# Altium PCB Chronos.PcbDoc (part 5 of 6)
Units mm, origin at the board's own origin, x right, y up, seen from the top; angles counter-clockwise.
Board outline 74.94 x 59.01 mm, 8 copper layers (TOP, L02_GND, L03_SIG, L04_PWR, L05_GND, L06_SIG, L07_GND, BOTTOM), stack 1.624 mm thick; 413 components, 238 nets, 1566 pads, 873 vias.
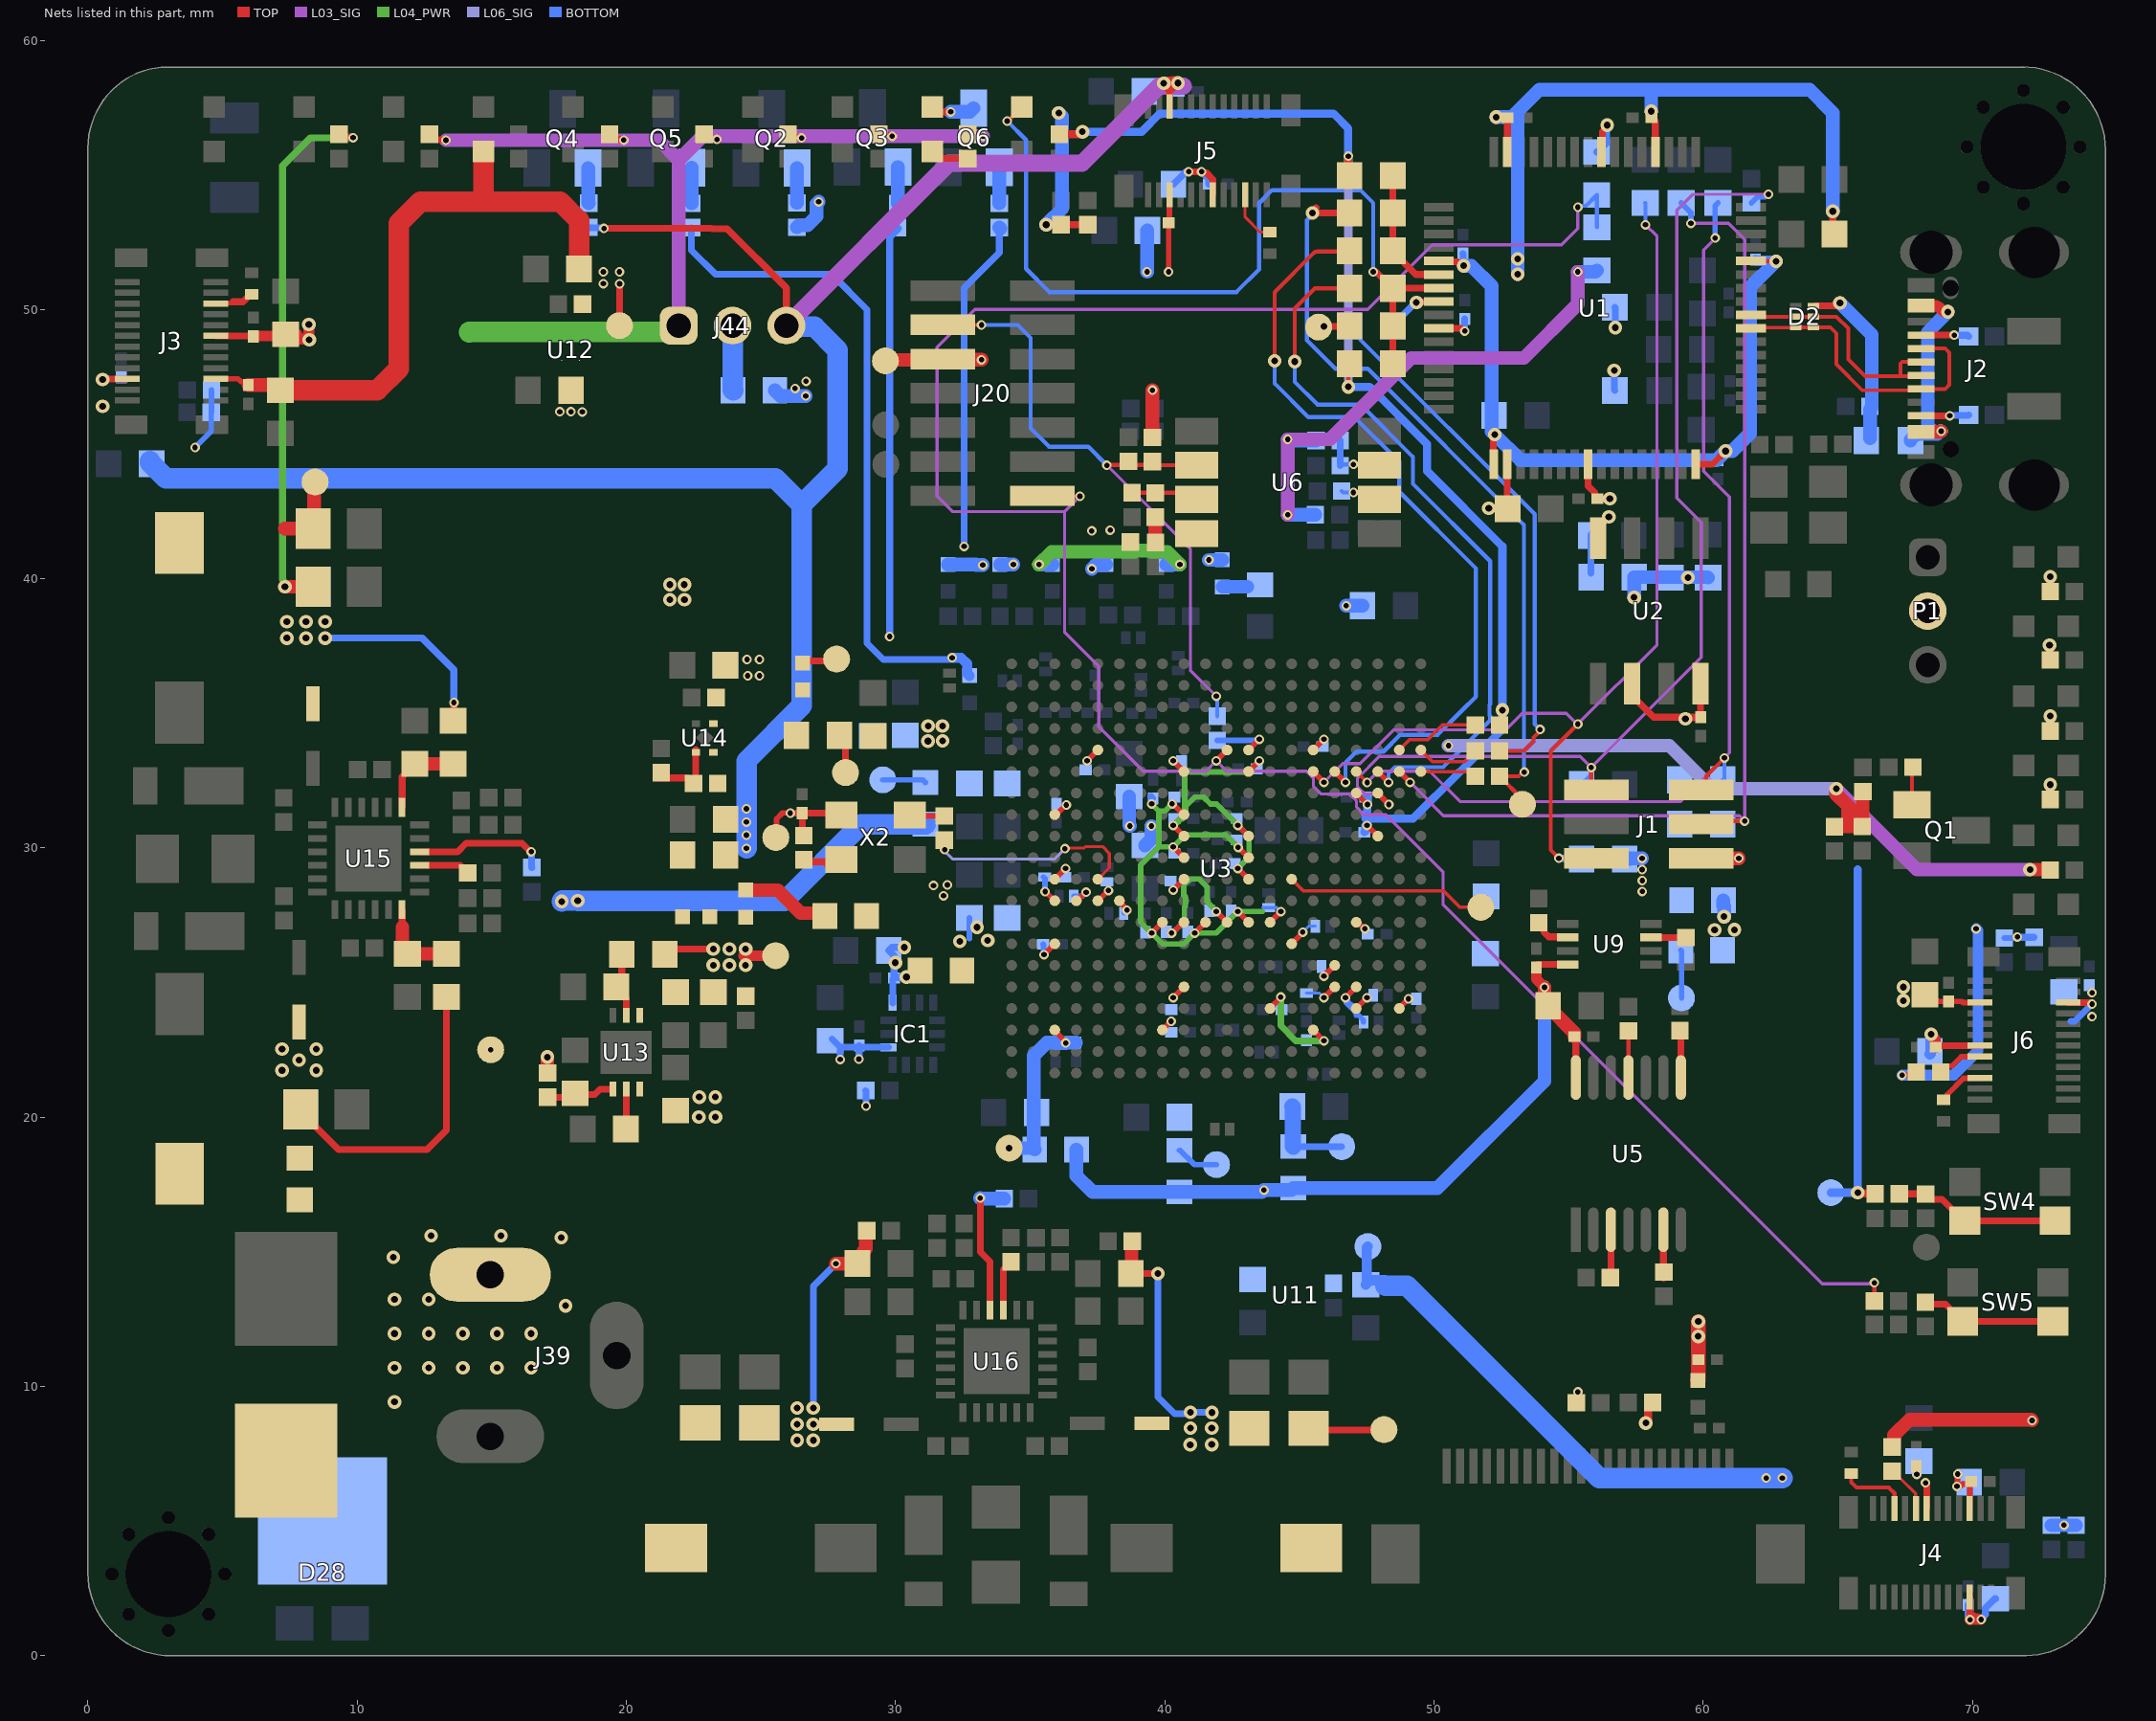
[diagram p10: the nets of this part, all layers, seen from the top]

## Via types
v1: diameter 0.356, hole 0.203, TOP to BOTTOM, tented both sides, 492 vias
v2: diameter 0.508, hole 0.254, TOP to BOTTOM, tented both sides, 380 vias
v3: diameter 0.356, hole 0.203, TOP to BOTTOM, 1 vias

## Nets (pads, with @x,y where several pads share a name; then routed paths per layer and width w, separated by ;. In a path a pad name is that pad's centre, name@x,y a point inside that pad or via, vN(x,y) a via of type N, cw(c..) or ccw(c..) an arc to the next point about the centre after c; other vN are vias at no path point) (continued)
NetD27_1: D27.1 Q6.3 | length 1.7
  TOP w0.254: D27.1@31.359,57.515 31.533,57.341 v1(32.049,57.341)
  BOTTOM w0.508: v1(32.049,57.341) 32.763,57.341 Q6.3@32.9,57.477
NetD27_2: D27.2 R126.1 | length 1.4
  TOP w0.254: D27.2@31.359,55.864 31.618,55.605 R126.1@32.679,55.605
NetD28_3: D28.3 F1.1 J39.1
  other v2: 11.386,9.428 11.386,10.698 12.656,10.698 13.926,10.698 15.196,10.698 16.466,10.698 11.386,11.968 12.656,11.968 13.926,11.968 15.196,11.968 16.466,11.968 17.745,13 11.386,13.238 12.656,13.238 11.345,14.8 17.579,15.529 12.745,15.6 15.345,15.6
NetFB2_1: FB2.1 J3.15 | length 1.5
  TOP w0.152: J3.15@4.745,50.222 4.756,50.233 5.342,50.233 5.398,50.289 ; FB2.1@6.01,50.485 FB2.1@6.086,50.561
  TOP w0.254: 5.398,50.289 5.764,50.289 5.963,50.488 FB2.1@6.01,50.488
NetFB3_1: FB3.1 J4.15 | length 2.7
  TOP w0.152: FB3.1@65.502,6.765 65.502,6.443 65.694,6.251 66.894,6.251 67.109,6.036 J4.15@67.109,5.464
NetFB5_1: FB5.1 R137.2 | length 0.9
  BOTTOM w0.508: FB5.1@42.145,39.7 R137.2@43.064,39.7
NetFB6_1: FB6.1 R138.2 | length 3.4
  TOP w0.508: FB6.1@24.429,28.435 25.623,28.435 26.475,27.583 27.267,27.583 R138.2@27.374,27.476 R138.2@27.32,27.476
NetFB7_1: FB7.1 R149.1
NetFB8_1: FB8.1 R150.1
NetFB9_1: FB9.1 J5.15 | length 2
  TOP w0.114: J5.15@42.985,54.261 42.985,53.437 43.55,52.872 FB9.1@43.912,52.872
NetFB10_1: FB10.1 J6.15 | length 1.7
  TOP w0.203: FB10.1@68.925,20.651 68.975,20.651 69.073,20.749 69.073,20.849 69.671,21.447 70.267,21.447 J6.15@70.281,21.46
NetJ2_A5: J2.A5 R55.1 | length 1.8
  TOP w0.254: J2.A5@68.095,46.05 69.157,46.05 v1(69.164,46.056)
  BOTTOM w0.254: v1(69.164,46.056) 69.176,46.068 69.854,46.068 R55.1@69.866,46.08
NetJ2_B5: J2.B5 R56.1 | length 1.8
  TOP w0.254: J2.B5@68.095,49.05 68.097,49.047 69.325,49.047 v1(69.327,49.045)
  BOTTOM w0.254: v1(69.327,49.045) 69.821,49.045 R56.1@69.866,49
NetJ4_17: J4.17 R36.1 | length 1.8
  TOP w0.114: R36.1@67.026,6.852 67.294,6.585 67.333,6.585 67.889,6.028 67.889,5.484 J4.17@67.909,5.464
NetJ6_17: J6.17 R51.1 | length 1.7
  TOP w0.203: R51.1@68.822,21.682 69.046,21.905 69.25,21.905 69.591,22.247 70.267,22.247 J6.17@70.281,22.26
NetJ44_2: J44.2 R127.1 | length 2.4
  BOTTOM w0.762: J44.2@23.945,49.4 23.957,49.388 23.957,47.012 R127.1@23.97,47
NetL15_1: L15.1 R153.1
NetQ1_1: Q1.1 R83.1 | length 1.4
  TOP w0.152: Q1.1@67.758,31.608 67.758,32.963 R83.1@67.795,33
NetQ2_1: Q2.1 R123.1 | length 1.3
  BOTTOM w0.508: R123.1@26.334,53.955 26.338,53.959 26.338,55.251 Q2.1@26.342,55.255
NetQ3_1: Q3.1 R122.1 | length 1.4
  BOTTOM w0.508: R122.1@30.08,53.939 30.085,53.944 30.085,55.284 Q3.1@30.09,55.289
NetQ4_1: Q4.1 R124.1 | length 1.3
  BOTTOM w0.508: Q4.1@18.574,55.255 18.589,55.24 18.589,53.965 R124.1@18.605,53.95
NetQ5_1: Q5.1 R132.1 | length 1.4
  BOTTOM w0.508: Q5.1@22.398,54.94 Q5.1@22.426,54.968 ; R132.1@22.422,53.937 22.426,53.942 Q5.1@22.426,54.968 ; Q5.1@22.43,55.266 22.43,54.972 Q5.1@22.426,54.968
NetQ6_1: Q6.1 R133.1 | length 1.3
  BOTTOM w0.508: Q6.1@33.85,55.278 33.852,55.276 33.852,53.944 R133.1@33.854,53.942
NetR12_2: R12.2 R16.2 U2.4 | length 2.4
  BOTTOM w0.254: R12.2@55.826,40.203 55.826,41.625 v2@56.499,42.297
  other v2: 56.499,42.297
NetR15_1: R15.1 R19.1 R20.1 U1.38 | length 4.9
  TOP w0.254: R19.1@48.47,54.977 R20.1@48.47,53.58 R15.1@48.47,52.183 48.47,52.157 49.329,51.299 U1.38@50.176,51.299
NetR22_1: R22.1 U1.40 | length 2.1
  TOP w0.254: v2(49.351,50.262) 49.369,50.281 50.157,50.281 U1.40@50.176,50.299
  BOTTOM w0.254: R22.1@48.47,49.389 48.47,49.414 49.319,50.262 v2(49.351,50.262)
NetR23_1: R23.1 X2.1 | length 1.5
  TOP w0.254: R23.1@26.561,29.494 27.45,29.494 X2.1@27.45,29.495 ; X2.1@27.425,29.394 27.836,29.805 X2.1@27.907,29.805
NetR24_1: R24.1 X2.3 | length 1.4
  TOP w0.203: X2.3@30.447,31.226 30.485,31.188 R24.1@31.877,31.188
NetR24_2: R24.2 U3.L5 | length 8.1
  TOP w0.114: R24.2@31.814,30.288 31.826,30.276 v1(31.826,29.94) ; v1(36.292,29.972) 36.319,29.999 37.009,29.999 37.065,30.055 37.69,30.055 37.945,29.8 37.945,29.269 U3.L5@37.515,28.84
  L06_SIG w0.114: v1(31.826,29.94) 31.826,29.874 32.107,29.593 32.745,29.593 35.913,29.593 v1(36.292,29.972)
NetR34_1: R34.1 U3.M3 | length 1.1
  TOP w0.203: v1(35.558,28.381) 35.566,28.381 35.945,28.003 U3.M3@35.945,28
  BOTTOM w0.203: R34.1@35.495,28.926 35.551,28.869 35.551,28.388 v1(35.558,28.381)
NetR35_1: R35.1 U3.M4 | length 1
  TOP w0.203: U3.M4@36.716,28.043 36.746,28.043 37.056,28.354 v1(37.083,28.354)
  BOTTOM w0.203: R35.1@36.624,28.215 36.943,28.215 v1(37.083,28.354)
NetR47_1: R47.1 U3.M5 | length 0.6
  TOP w0.203: U3.M5@37.515,28.043 37.526,28.043 37.903,28.421 v1(37.911,28.421)
NetR48_1: R48.1 U3.M6 | length 0.6
  TOP w0.203: U3.M6@38.316,28.04 38.316,28.007 38.597,27.726 v1(38.597,27.693)
  BOTTOM w0.203: R48.1@38.491,27.587 v1(38.597,27.693)
NetR58_1: R58.1 U5.3 | length 1.8
  TOP w0.254: R58.1@56.554,14.046 56.573,14.066 U5.3@56.573,15.821
NetR59_1: R59.1 U5.6 | length 1.8
  TOP w0.254: U5.6@58.523,15.821 58.523,14.033 R59.1@58.535,14.021
NetR60_1: R60.1 U5.8 | length 1.8
  TOP w0.254: R60.1@59.138,23.216 59.173,23.181 U5.8@59.173,21.472
NetR61_1: R61.1 U5.11 | length 1.7
  TOP w0.152: U5.11@57.223,21.472 57.232,21.48 R61.1@57.232,23.208
NetR62_1: R62.1 U9.6 | length 1.3
  TOP w0.254: R62.1@53.896,27.221 54.094,27.023 54.094,26.869 54.264,26.7 U9.6@54.939,26.7
NetR63_1: R63.1 U9.3 | length 1.3
  TOP w0.254: U9.3@58.062,26.677 59.354,26.677 R63.1@59.357,26.674
NetR64_1: R64.1 U3.N13 | length 1.3
  TOP w0.203: U3.N13@43.915,27.24 v1(44.315,27.64)
  BOTTOM w0.114: R64.1@43.639,27.785 44.17,27.785 v1(44.315,27.64)
NetR65_1: R65.1 U3.P14 | length 1.1
  TOP w0.203: U3.P14@44.716,26.44 v1@45.116,26.84
  BOTTOM w0.114: v1(45.125,26.875) 45.345,27.096 R65.1@45.596,27.096
NetR66_1: R66.1 U3.R16 | length 0.6
  TOP w0.203: v1(45.915,25.24) 45.915,25.26 45.995,25.34 v1@45.995,25.36 ; v1@46.015,25.34 U3.R16@46.315,25.64
NetR67_1: R67.1 U3.T16 | length 1.3
  TOP w0.203: v1(45.915,24.44) U3.T16@46.315,24.84
  BOTTOM w0.114: R67.1@45.258,24.613 45.742,24.613 v1(45.915,24.44)
NetR68_1: R68.1 U3.T17 | length 2.6
  TOP w0.203: v1(46.715,24.44) U3.T17@47.115,24.84
  BOTTOM w0.114: v1(46.715,24.44) 46.744,24.411 47.073,24.082 47.073,23.915 47.073,23.763 47.099,23.738
  BOTTOM w0.203: v1@46.744,24.411 46.744,24.243 47.073,23.915 47.385,23.602 R68.1@47.385,23.537
NetR69_2: R69.2 R72.1 SW4.1 SW4.3 | length 6.2
  TOP w0.254: R69.2@67.293,17.157 68.25,17.157 68.458,16.949 68.874,16.949 69.671,16.152 SW4.1@73.071,16.152
NetR70_1: R70.1 U3.U17 | length 0.6
  TOP w0.203: U3.U17@47.115,24.04 v1(47.515,24.44)
NetR73_2: R73.2 U3.E20 | length 2.4
  TOP w0.127: U3.E20@49.515,33.64 49.955,33.2 50.945,33.2 51.135,33.2 R73.2@51.539,33.604
NetR74_2: R74.2 U3.F20 | length 2.1
  TOP w0.127: U3.F20@49.515,32.84 51.364,32.84 R74.2@51.539,32.664
NetR75_1: R75.1 U3.E19 | length 3.2
  TOP w0.127: U3.E19@48.715,33.64 49.106,34.031 49.775,34.031 50.314,34.569 50.945,34.569 R75.1@51.539,34.569
NetR78_2: R78.2 U3.E12 | length 2.1
  TOP w0.203: U3.E12@43.115,33.64 v1(43.515,34.04)
  BOTTOM w0.203: R78.2@41.949,33.996 43.389,33.996 ccw(c43.388,34.199) v1(43.515,34.04)
NetR80_1: R80.1 SW5.1 SW5.3 | length 5.1
  TOP w0.254: R80.1@68.161,13.034 68.191,13.064 69,13.064 69.197,12.867 69.197,12.817 69.595,12.419 SW5.1@72.995,12.419
NetR85_1: R85.1 R91.1 U6.3 | length 1.4
  BOTTOM w0.152: R91.1@46.572,44.247 v1(47.011,44.247)
  BOTTOM w0.254: R91.1@46.521,44.196 46.572,44.247 46.521,44.298 R85.1@46.521,45.136
NetR87_1: R87.1 R90.2 U6.7 | length 2.6
  TOP w0.152: R90.2@38.789,43.19 40.934,43.19 U6.7@41.18,42.945 U6.7@41.083,42.848
NetR89_2: R89.2 U6.2 | length 0.5
  BOTTOM w0.152: R89.2@46.572,43.256 46.623,43.205 v1(47.011,43.205)
NetR140_1: R140.1 R145.1 U14.3 | length 2.7
  TOP w0.254: R145.1@21.145,32.6 22.295,32.6 R140.1@22.494,32.4 22.578,32.484 U14.3@22.578,33.649
NetR142_1: R142.1 R146.1 U13.4 | length 2.6
  TOP w0.254: R142.1@17.072,20.743 17.95,20.743 R146.1@18.092,20.885 18.128,20.848 18.829,20.848 19.023,21.041 U13.4@19.494,21.041
NetR143_1: R143.1 R148.2 U13.2 | length 2.5
  TOP w0.254: R143.1@19.829,26.048 19.829,25.048 R148.2@19.63,24.848 19.63,24.823 19.995,24.458 U13.2@19.995,23.791
NetR147_1: R147.1 U13.5 | length 1.5
  TOP w0.254: R147.1@19.982,19.559 19.995,19.572 U13.5@19.995,21.041
NetR151_2: R151.2 U15.21 | length 1.9
  TOP w0.254: U15.21@12.321,29.36 13.827,29.36 R151.2@14.111,29.077
NetR154_2: R154.2 R156.1 U15.1 | length 3.2
  TOP w0.254: U15.1@11.671,31.51 11.671,32.651 R156.1@12.148,33.128
  TOP w0.508: R156.1@12.148,33.128 R154.2@13.57,33.128
NetR155_2: R155.2 R160.1 U15.18 | length 3.2
  TOP w0.254: U15.18@11.671,27.71 11.671,27.06 11.679,27.051
  TOP w0.508: 11.679,27.051 11.679,26.256 R160.1@11.868,26.067 R155.2@13.316,26.067
NetR158_1: R158.1 U15.22 | length 5
  TOP w0.254: U15.22@12.321,29.86 13.731,29.86 14.045,30.174 16.128,30.174 16.442,29.86 v1(16.47,29.86) v1@16.48,29.87
  BOTTOM w0.254: v1(16.47,29.86) 16.48,29.849 16.48,29.284 R158.1@16.491,29.273
NetR161_2: R161.2 U16.21 | length 1.9
  TOP w0.254: U16.21@34.003,12.837 34.003,14.344 R161.2@34.287,14.628
NetR167_1: R167.1 U16.22 | length 5.2
  TOP w0.254: v1(33.145,17) 33.149,16.996 33.149,14.996 33.503,14.641 U16.22@33.503,12.837
  BOTTOM w0.508: v1(33.145,17) 33.168,16.977 R167.1@34.04,16.977
NetR173_1: R173.1 U1.24 | length 2.2
  TOP w0.254: U1.24@56.226,55.849 56.259,55.882 56.259,56.601 56.434,56.776 v2(56.434,56.845)
  BOTTOM w0.254: R173.1@56.052,55.853 56.077,55.853 56.425,56.201 56.425,56.836 v2(56.434,56.845)
NetTP9_1: TP9.1 U3.L14 | length 7.5
  TOP w0.127: U3.L14@44.716,28.84 45.15,28.405 50.358,28.405 50.963,27.8 51.027,27.8 TP9.1@51.745,27.8
PROGRAMN: J20.1 R77.1 R172.2 R173.2 U3.E11 | length 89.7
  TOP w0.152: J20.1@35.45,43.078 35.469,43.059 v1(36.847,43.059) ; R77.1@66.363,13.172 v1(66.363,13.853)
  TOP w0.203: v1(41.915,33.24) U3.E11@42.315,33.64
  L03_SIG w0.114: v1(36.847,43.059) 36.285,42.496 ; v1(55.345,53.8) 55.345,53 54.745,52.4 49.945,52.4 47.545,50 32.945,50 31.545,48.6 31.545,43.067 32.115,42.496 36.285,42.496 ; v1@66.363,13.814 64.422,13.814 50.345,27.891 50.345,29.102 48.215,31.232 47.405,31.232 47.125,31.512 47.125,31.742 46.865,32.002 46.566,32.002 46.563,32 46.067,32 46.065,32.002 45.819,32.002 45.519,32.302 45.519,32.607 45.272,32.854 42.301,32.854 v1(41.915,33.24) 41.527,32.852 39.893,32.852 39.203,32.852 37.554,34.502 37.554,36.737 36.285,38.006 36.285,42.496
  BOTTOM w0.152: v1(55.345,53.8) 55.4,53.8 55.453,53.854 55.653,53.854 R173.2@56.052,54.253 56.057,54.248 R172.2@56.057,53.055
RXD_UART: R17.2 U3.F18 | length 27.1
  TOP w0.152: v2(44.831,48.067) 44.831,50.041 45.575,50.786 R17.2@46.87,50.786
  TOP w0.203: U3.F18@47.915,32.84 v1(48.315,32.44)
  BOTTOM w0.152: v2(44.831,48.067) 44.831,47.313 45.675,46.47 47.275,46.47 49.221,44.524 49.221,43.524 52.089,40.655 52.089,35.35 52.062,35.323 52.062,34.923 52.089,34.895 52.089,34.745 50.945,33.6 50.345,33 48.545,33 48.315,32.771 v1(48.315,32.44)
SCL: R20.2 R74.1 TP1.1 | length 29
  TOP w0.152: TP1.1@53.285,31.623 53.285,31.819 R74.1@52.439,32.664 53.15,32.664 53.301,32.815 v1(53.356,32.815)
  TOP w0.254: v2@45.619,53.78 45.491,53.652 v2(45.491,53.583) 46.866,53.583 R20.2@46.87,53.58 ; TP1.1@53.238,31.576 TP1.1@53.285,31.623
  BOTTOM w0.152: v2(45.491,53.583) 45.491,53.521 45.286,53.316 45.286,48.859 46.345,47.8 47.545,47.8 53.345,42 53.345,32.827 v1(53.356,32.815)
SDA: R21.2 R22.2 R73.1 TP2.1 | length 22.7
  TOP w0.152: R73.1@52.439,33.604 53.349,33.604 53.703,33.959 53.703,34.104 53.945,34.345 v1(53.945,34.4)
  TOP w0.254: v2(45.917,49.368) 46.85,49.368 R21.2@46.87,49.389
  BOTTOM w0.152: R22.2@46.86,49.398 46.831,49.368 45.985,49.368 v2(45.917,49.368) 46.865,49.368 47.269,48.965 47.269,48.876 53.745,42.4 53.745,34.6 v1(53.945,34.4)
SPI_MCLK: C81.1 J20.12 R78.1 R86.1 U6.6 | length 25.8
  TOP w0.152: J20.12@31.75,49.428 v1(33.193,49.428) ; v1(37.854,44.21) 37.868,44.224 R86.1@39.518,44.224 ; C81.1@38.635,44.341 C81.1@38.654,44.359 ; C81.1@38.745,44.215 R86.1@39.609,44.215 ; R86.1@39.409,44.215 R86.1@39.545,44.35 ; R86.1@39.557,44.162 R86.1@39.609,44.215 ; U6.6@41.016,44.379 U6.6@41.18,44.215 R86.1@39.609,44.215
  L03_SIG w0.114: v1@37.945,44.2 37.932,44.188 37.932,44.131 40.953,41.111 40.953,38.4 40.953,36.603 v1(41.915,35.64)
  BOTTOM w0.152: v1(33.193,49.428) 34.539,49.428 35.022,48.946 35.022,45.585 35.708,44.899 37.164,44.899 v1(37.854,44.21) ; v1(41.915,35.64) cw(c41.834,35.559) 41.949,35.559 R78.1@41.949,34.896
TCK: J1.6 R4.1 R5.2 U3.G18 | length 40.4
  TOP w0.152: v1(55.843,32.991) 55.843,32.347 J1.6@56.034,32.156
  TOP w0.203: U3.G18@47.915,32.04 47.915,32.031 48.323,31.623 v1(48.323,31.614)
  L03_SIG w0.114: v1(48.323,31.614) 48.323,31.632 47.96,31.996 47.457,31.996 47.38,32.073 47.37,32.073 47.158,32.285 47.158,32.586 47.974,33.401 48.117,33.401 49.654,33.401 55.433,33.401 v1(55.843,32.991) 59.929,37.077 59.929,42.092 59.026,42.995 59.026,53.682 59.624,54.28 v1(62.429,54.28)
  BOTTOM w0.152: R4.1@55.483,32.356 55.843,32.716 v1(55.843,32.991)
  BOTTOM w0.203: R5.2@61.799,53.959 62.022,54.183 62.29,54.183 62.387,54.28 v1(62.429,54.28)
TDI: J1.5 R2.2 R6.2 U3.F17 | length 38.9
  TOP w0.127: U3.F17@47.115,32.84 v1(47.52,32.435)
  TOP w0.152: J1.5@59.934,32.156 60.119,32.342 60.119,32.671 v1(60.794,33.345)
  L03_SIG w0.114: v1(47.52,32.435) 47.52,32.445 47.93,32.854 49.842,32.854 50.972,31.724 51.027,31.724 59.173,31.724 v1(60.794,33.345) 60.794,33.348 60.982,33.536 60.982,43.033 60.016,43.999 60.016,52.206 60.447,52.638 v1(60.447,52.654)
  BOTTOM w0.152: R2.2@60.734,32.531 60.794,32.591 v1(60.794,33.345)
  BOTTOM w0.203: v1(60.447,52.654) 60.447,53.849 R6.2@60.553,53.955
TDO: J1.3 R3.2 R7.2 U3.F19 | length 40.9
  TOP w0.152: J1.3@59.934,30.886 60.047,31 v1(61.545,31)
  TOP w0.203: U3.F19@48.715,32.84 v1(49.116,32.44)
  L03_SIG w0.114: v1(49.116,32.44) 50.355,31.2 61.345,31.2 v1(61.545,31) 61.545,52.6 60.945,53.2 v1(59.545,53.2)
  BOTTOM w0.152: R3.2@60.734,30.886 60.847,31 v1(61.545,31)
  BOTTOM w0.203: R7.2@59.182,53.955 59.545,53.592 v1(59.545,53.2)
TMS: J1.2 R1.2 R8.2 U3.F15 | length 39.7
  TOP w0.152: v1(55.345,34.6) 54.339,33.594 54.339,29.924 v1(54.645,29.617) J1.2@56.034,29.616
  TOP w0.203: U3.F15@45.515,32.84 v1(45.915,32.44)
  L03_SIG w0.114: v1(45.915,32.44) 46.612,33.136 47.254,33.136 48.501,34.384 50.945,34.384 52.663,34.384 53.28,35 54.919,35 55.332,34.587 58.289,37.544 58.289,52.715 v1(57.857,53.147)
  BOTTOM w0.152: R1.2@55.461,29.617 R1.2@55.483,29.594 ; R8.2@57.851,53.955 57.857,53.949 v1(57.857,53.147)
  BOTTOM w0.254: v1(54.645,29.617) R1.2@55.461,29.617
TXD_UART: R15.2 U3.F16 | length 29.7
  TOP w0.152: v2(44.082,48.093) 44.082,50.579 cw(c44.234,50.579) 44.126,50.687 45.545,52.106 cw(c45.653,51.998) 45.653,52.15 46.837,52.15 R15.2@46.87,52.183
  TOP w0.203: U3.F16@46.315,32.84 v1(46.715,32.44)
  BOTTOM w0.152: v2(44.082,48.093) 44.082,47.252 45.334,46 47.056,46 48.713,44.343 48.713,43.232 51.561,40.384 51.561,35.624 51.027,35.089 50.142,34.205 48.75,34.205 48.127,33.582 47.127,33.582 46.715,33.171 v1(46.715,32.44)
UART_ACT: D1.1 R17.1 R18.1 R21.1 U1.39 | length 31
  TOP w0.152: v1(34.145,57) 34.177,57 D1.1@34.692,57.515
  TOP w0.254: v1(47.745,51.4) 47.856,51.4 R17.1@48.47,50.786 ; R18.1@48.47,47.992 R21.1@48.47,49.389 R17.1@48.47,50.786 ; U1.39@50.176,50.799 48.484,50.799 R17.1@48.47,50.786
  BOTTOM w0.152: v1(34.145,57) 34.847,56.298 34.847,51.514 35.713,50.648 42.667,50.648 43.505,51.485 43.505,53.949 43.988,54.432 47.265,54.432 47.745,53.952 v1(47.745,51.4)
USB_D_N: D2.3 D2.4 J2.A7 J2.B7 U1.7 | length 11.4
  TOP w0.14: U1.7@61.776,49.299 61.804,49.327 63.438,49.327 D2.3@63.445,49.333 D2.4@64.095,49.333 64.729,49.333 64.948,49.115 64.948,47.963 65.911,47 68.045,47 J2.B7@68.095,47.05 68.995,47.05 69.145,47.2 69.145,48.4 68.995,48.55 J2.A7@68.095,48.55
USB_D_P: D2.2 D2.5 J2.A6 J2.B6 U1.8 | length 9.2
  TOP w0.14: U1.8@61.776,49.799 61.842,49.733 D2.2@63.445,49.733 D2.5@64.095,49.733 64.958,49.733 65.392,49.299 65.392,48.147 66.021,47.518 67.33,47.518 ; J2.A6@68.095,47.55 68.063,47.518 67.33,47.518 ; J2.B6@68.095,48.05 67.395,48.05 67.33,47.985 67.33,47.518
V1P0_LDO: C137.1 C138.1 FB7.2 L6.2 L7.2 L8.2 L9.2 R133.2 R141.1 TP_V1P0_LDO.1 U14.1 | length 22.2
  TOP w0.254: FB7.2@26.545,36.875 26.616,36.946 27.739,36.946 TP_V1P0_LDO.1@27.81,37.017
  L04_PWR w0.508: v1(35.332,40.531) 35.801,41 38.895,41 38.943,41.048 39.427,41.048 39.475,41 40.096,41 v1(40.565,40.531)
  BOTTOM w0.254: v1(32.545,41.2) 32.545,50.8 33.854,52.109 R133.2@33.854,53.042
  BOTTOM w0.508: L9.2@31.945,40.531 31.962,40.531 31.966,40.527 32.982,40.527 33,40.509 v1(33.24,40.509) ; R133.2@33.854,53.042 R133.2@33.886,53.01 ; L7.2@33.879,40.531 v1(34.382,40.531) ; v1(35.332,40.531) L8.2@35.835,40.531 ; L6.2@40.062,40.531 v1(40.565,40.531)
  other v1: 24.506,36.398 24.945,36.4 24.482,37.001 24.945,37
V1P2: C19.1 C22.1 C39.1 C40.1 C46.1 C47.1 C103.1 C104.1 C110.1 J3.18 J4.18 J5.18 J6.18 R116.1 R123.2 TP_V1P2.1 U11.1 | length 33.1
  TOP w0.254: J3.18@4.745,49.022 4.751,49.017 C40.1@6.128,49.017 ; v1(40.889,55.118) v1(41.372,55.118) 41.399,55.118 41.45,55.067 41.549,55.067 41.785,54.831 J5.18@41.785,54.261 ; C19.1@67.915,7.041 67.927,7.029 67.927,6.751 v1(67.939,6.739) ; v1(68.263,6.42) 68.263,6.393 68.309,6.347 J4.18@68.309,5.464 ; C104.1@68.645,22.6 68.705,22.66 J6.18@70.281,22.66
  TOP w0.406: C40.1@6.128,49.017 7.282,49.017 C39.1@7.342,49.077 ; C39.1@7.765,49.077 7.524,49.077 C39.1@7.342,49.077 ; v2@8.208,48.902 v2(8.208,49.442) ; v2(8.22,48.876) 8.2,48.895 7.524,48.895 C39.1@7.342,49.077 ; v2(68.471,23.082) 68.471,23.054 68.623,22.903 68.623,22.603 68.626,22.6 C104.1@68.645,22.6
  BOTTOM w0.254: C46.1@40.322,54.656 40.784,55.118 v1(40.889,55.118) ; v1(41.372,55.118) 41.639,54.851 C47.1@41.639,54.661
  BOTTOM w0.381: C110.1@47.469,13.778 C110.1@47.507,13.816 ; TP_V1P2.1@47.545,15.2 47.507,15.162 C110.1@47.507,13.816 ; 48.193,13.945 47.636,13.945 C110.1@47.507,13.816
  BOTTOM w0.406: C103.1@68.427,22.345 68.452,22.37 68.452,23.063 v2(68.471,23.082)
  BOTTOM w0.508: R123.2@26.334,53.054 26.405,53.125 26.729,53.125 27.065,53.461 27.065,53.921 v1(27.145,54)
  BOTTOM w0.762: 48.193,13.745 49,13.745 56.145,6.6 v1(62.345,6.6) v1(62.945,6.6)
V1P8: C23.1 C24.1 C41.1 C42.1 C48.1 C49.1 C69.1 C70.1 C71.1 C72.1 C98.1 C99.1 C100.1 C105.1 C109.1 C135.1 C167.2 C169.1 C170.1 C171.1 D34.2 IC1.5 IC1.8 J3.3 J4.3 J5.3 J6.3 J44.3 L17.1 P1.2 R57.1 R124.2 R130.1 R134.1 R135.1 R136.1 R140.2 R150.2 R165.1 TP_V1P8.1 U5.14 U9.8 U11.3 U11.4 U14.4 | length 131.6
  TOP w0.203: v2(39.964,58.404) 39.964,58.322 40.102,58.184 40.102,58.158 40.154,58.106 40.154,58.007 ; J5.3@40.185,57.541 40.198,57.554 40.198,58.089 v2@40.49,58.38
  TOP w0.254: v2(0.545,47.4) 0.561,47.417 1.46,47.417 J3.3@1.465,47.422 ; v1(19.172,53.01) 23.169,53.01 23.176,53.003 23.742,53.003 25.945,50.8 J44.3@25.945,49.4 ; R165.1@38.745,14.2 v2(39.745,14.2) ; 46.147,8.38 48.125,8.38 TP_V1P8.1@48.145,8.4 ; C99.1@53.81,25.68 U9.8@54.959,25.68 ; C100.1@55.223,22.998 55.273,22.947 U5.14@55.273,21.472 ; J4.3@69.909,2.184 J4.3@69.913,2.18 ; v1(69.917,1.339) 69.913,1.343 J4.3@69.913,2.18 ; v1(70.328,1.346) 70.3,1.346 70.202,1.444 70.078,1.444 69.915,1.608 69.915,2.178 J4.3@69.913,2.18 ; J6.3@73.561,24.26 73.566,24.254 74.368,24.254 74.419,24.204 v1(74.447,24.204)
  TOP w0.381: C99.1@53.81,25.565 53.81,25.125 v1(54.107,24.828)
  TOP w0.406: v1(69.917,1.339) 69.924,1.346 v1@70.3,1.346
  TOP w0.508: R165.1@38.745,14.2 38.77,14.225 38.77,15.375 C167.2@38.795,15.4 ; v2(39.964,58.404) 40.298,58.404 40.302,58.407 v2@40.489,58.407 ; v1(54.107,24.828) 54.107,24.273 C98.1@54.239,24.141 54.239,24.116 55.223,23.132 C100.1@55.223,22.998
  L03_SIG w0.635: J44.3@25.945,49.4 31.975,55.43 36.929,55.43 39.793,58.293 40.49,58.293 v2@40.686,58.293
  BOTTOM w0.254: R124.2@18.605,53.05 18.625,53.029 19.153,53.029 v1(19.172,53.01) ; C71.1@27.642,22.903 C71.1@27.945,22.6 ; v1(27.945,22.147) C71.1@27.945,22.6 ; v1(28.634,22.162) 28.645,22.173 C72.1@28.645,22.6 ; C72.1@28.645,22.658 C72.1@28.645,22.6 ; R57.1@28.885,20.99 28.9,20.975 28.9,20.424 v1(28.906,20.418) ; C69.1@29.744,26.194 C69.1@29.748,26.197 ; IC1.5@29.745,22.6 C72.1@28.645,22.6 ; C69.1@29.745,26.2 C69.1@29.748,26.197 ; IC1.8@29.895,24.25 29.895,25.122 C70.1@29.946,25.173 ; v2(30.323,26.309) 29.86,26.309 C69.1@29.748,26.197 ; v2(30.404,25.209) 30.386,25.191 29.963,25.191 C70.1@29.946,25.173 ; v2(39.745,14.2) 39.745,9.613 40.366,8.991 41.004,8.991 41.05,9.037 41.75,9.037 v2(41.753,9.035) ; C24.1@69.845,1.885 69.845,1.41 v1(69.917,1.339) ; v1(70.328,1.346) 70.328,1.374 70.488,1.534 70.488,1.773 70.836,2.121 C23.1@70.861,2.121 ; 73.656,23.562 73.805,23.562 v1(74.447,24.204) ; C71.1@27.945,22.6 C72.1@28.645,22.6 ; C69.1@29.748,26.197 29.946,25.999 29.946,25.739 C70.1@29.946,25.173
  BOTTOM w0.508: R136.1@36.72,18.8 36.72,17.825 37.32,17.225 R135.1@40.545,17.225 43.612,17.225 v1(43.685,17.298) 44.704,17.298 R134.1@44.774,17.368 50.129,17.368 54.107,21.345 v1(54.107,24.828)
  BOTTOM w0.762: C41.1@2.307,44.367 2.307,44.311 2.889,43.729 25.535,43.729 26.513,42.751 ; v1(24.463,29.988) v1(24.463,30.476) v1(24.463,30.965) v1(24.463,31.453) 24.463,33.23 26.513,35.281 26.513,42.751 ; J44.3@25.945,49.4 25.984,49.36 26.987,49.36 27.851,48.497 27.851,44.089 26.513,42.751
  other v1: 74.449,23.733 74.447,24.624
  other v2: 40.945,7.838 41.748,7.846 40.956,8.453 41.747,8.453 40.955,9.04 29.995,25.739 0.545,46.4 40.49,58.408
V1P8_LDO: C139.1 C140.1 FB5.2 FB6.2 FB8.2 L4.2 L5.2 R132.2 R143.2 R144.1 TP_V1P8_LDO.1 U13.1 | length 29.4
  TOP w0.254: R143.2@21.43,26.048 21.63,26.248 v2(23.229,26.248)
  TOP w0.381: 24.345,26 TP_V1P8_LDO.1@25.545,26
  BOTTOM w0.254: R132.2@22.422,53.037 22.422,52.199 23.313,51.308 27.631,51.308 28.945,49.994 28.945,37.6 29.545,37 32.037,37 v1(32.103,37.065)
  BOTTOM w0.381: v1(32.103,37.065) 32.437,37.065 32.66,36.842 32.66,36.484 L5.2@32.745,36.4
  BOTTOM w0.508: v1(37.295,40.372) 37.432,40.51 37.795,40.51 L4.2@37.816,40.531 ; v1(41.642,40.7) FB5.2@42.145,40.7
  other v2: 23.229,25.648 23.829,25.648 24.429,25.648 23.829,26.248 24.429,26.248
V1P8_VCCAUX: C126.1 C127.1 C128.1 C129.1 C130.1 C131.1 C132.1 C133.2 C134.2 R138.1 U3.H9 U3.K9 U3.K12 U3.N8 U3.N10 U3.N12 | length 19.5
  TOP w0.203: v1(39.515,26.84) U3.N8@39.915,27.24 ; v1(40.274,31.64) 40.295,31.64 40.695,31.24 U3.H9@40.716,31.24 ; v1(40.315,30.04) U3.K9@40.716,29.64 ; v1(41.115,26.84) U3.N10@41.515,27.24 ; v1(42.715,27.64) U3.N12@43.115,27.24 ; v1(42.725,30.024) 42.728,30.024 43.112,29.64 U3.K12@43.115,29.64
  L04_PWR w0.203: v1(39.515,31.64) 39.785,31.371 ; v1(40.274,31.64) 40.005,31.371 39.785,31.371 ; v1(42.725,30.024) 42.725,30.03 42.269,30.486 40.761,30.486 v1(40.315,30.04) 39.785,30.04 ; 43.633,27.64 v1(42.715,27.64) 41.915,26.84 v1(41.115,26.84) 40.709,26.434 39.922,26.434 v1(39.515,26.84) 39.109,27.246 39.109,29.364 39.785,30.04 ; 39.785,30.04 39.785,31.371
  BOTTOM w0.254: C132.1@39.487,31.908 C132.1@39.545,31.85
  BOTTOM w0.508: C133.2@38.68,31.908 38.68,30.846 v1(38.707,30.819) ; C134.2@39.267,30.1 39.504,30.336 v1(39.504,30.818)
  other v1: 31.786,28.226 31.409,28.605 31.928,28.626
V2P8: C18.1 C21.1 C37.1 C38.1 C44.1 C45.1 C101.1 C102.1 C112.1 D22.2 J3.22 J4.22 J5.22 J6.22 R120.1 TP_V2P8.1 U12.1 | length 33.2
  TOP w0.203: J3.22@4.745,47.422 5.579,47.422 5.686,47.316 ; v1@40.145,51.401 C45.1@40.146,53.221 40.172,53.247 40.172,54.248 J5.22@40.185,54.261 ; C101.1@68.728,24.308 68.732,24.304 69.115,24.304 C102.1@69.119,24.3 69.624,24.3 69.664,24.26 J6.22@70.281,24.26 ; v1(69.461,6.749) 69.445,6.733 69.445,6.308 v1(69.429,6.292) 69.458,6.321 69.578,6.321 69.636,6.379 69.854,6.379 69.922,6.447 C18.1@69.953,6.477 69.909,6.433 J4.22@69.909,5.464
  TOP w0.254: TP_V2P8.1@19.748,49.204 19.746,49.206 19.746,50.954 v1(19.748,50.956)
  TOP w0.508: C38.1@5.956,47.192 6.955,47.192 C37.1@7.151,46.996
  TOP w0.762: C37.1@7.151,46.996 10.741,46.996 11.545,47.8 11.545,53.2 12.345,54 14.761,54 ; D22.2@14.693,55.864 14.693,54.069 14.761,54 ; C112.1@18.241,51.503 18.241,53.303 17.545,54 14.761,54
  BOTTOM w0.508: v1(39.345,51.4) 39.345,52.926 C44.1@39.353,52.934
  other v1: 19.146,50.959 19.145,51.4 19.745,51.4 40.145,51.4
  other v2: 67.441,24.332 67.439,24.836
V3P3: C1.1 C2.1 C3.1 C4.1 C5.2 C15.1 C97.1 C111.1 C136.1 C153.1 C154.1 D30.2 FB1.1 J44.1 L1.2 L3.2 R9.2 R10.1 R11.1 R12.1 R115.2 R117.2 R118.2 R119.2 R125.2 R126.2 R128.1 R129.1 R131.1 R142.2 R153.2 R155.1 TP_V3P3.1 U1.20 U1.31 U1.42 U1.50 U1.56 U2.6 U2.8 U12.3 U12.4 U13.6 | length 111.7
  TOP w0.254: C154.1@7.91,20.295 7.91,20.195 9.309,18.796 12.594,18.796 13.316,19.518 R155.1@13.316,24.467 ; R115.2@12.688,56.505 12.884,56.309 13.278,56.309 v1(13.297,56.289) ; R118.2@19.376,56.505 19.569,56.311 19.885,56.311 v1(19.904,56.292) ; R125.2@22.883,56.505 23.052,56.336 23.344,56.336 v1(23.363,56.316) ; R117.2@26.009,56.505 26.129,56.386 26.49,56.386 v1(26.509,56.366) ; R119.2@29.386,56.505 29.435,56.455 29.856,56.455 v1(29.875,56.436) ; R126.2@32.679,56.505 32.729,56.455 33.235,56.455 v1(33.254,56.436) ; U1.42@50.176,49.299 51.018,49.299 51.117,49.2 v1(51.145,49.2) ; v2(52.04,42.621) 52.713,42.621 C5.2@52.726,42.608 ; v2(52.311,57.144) 52.321,57.134 52.722,57.134 C4.1@52.731,57.125 52.729,57.122 52.729,55.852 U1.31@52.726,55.849 ; U1.50@52.726,44.249 C5.2@52.726,42.608 ; C5.2@52.738,42.596 C5.2@52.726,42.608 ; U1.56@55.726,44.249 55.726,43.444 55.975,43.195 55.975,43.05 56.048,42.977 C1.1@56.073,42.977 v2(56.536,42.977) ; U2.6@57.363,36.106 57.363,35.631 57.536,35.458 57.564,35.458 58.163,34.86 C15.1@59.907,34.86 ; v2(58.07,57.361) 58.075,57.356 58.075,57.125 C3.1@58.08,57.121 58.105,57.121 58.226,56.999 U1.20@58.226,55.849 ; v2(59.345,34.8) 59.374,34.83 59.902,34.83 C15.1@59.907,34.835 ; U2.8@59.903,36.106 59.907,36.102 C15.1@59.907,34.86 ; C15.1@59.907,34.766 C15.1@59.907,34.835 ; C15.1@59.912,34.86 C15.1@59.907,34.86 ; C15.1@59.922,34.849 C15.1@59.907,34.835 ; v2(64.816,53.645) 64.816,52.87 R9.2@64.88,52.807 ; C15.1@59.907,34.835 C15.1@59.907,34.86
  TOP w0.508: v2(17.068,22.235) 17.068,21.646 R142.2@17.072,21.643
  TOP w0.559: FB1.1@59.812,10.228 59.8,10.241 59.811,10.241 59.819,10.249 v2(59.819,11.863) 59.821,11.865 59.821,12.412 v2(59.824,12.415)
  L03_SIG w0.508: v1(13.297,56.289) 19.904,56.289 21.205,56.289 21.945,55.55 ; J44.1@21.945,49.4 21.945,55.55 ; v1(33.254,56.436) v1(29.875,56.436) 26.509,56.436 22.83,56.436 21.945,55.55
  L04_PWR w0.762: 14.157,49.155 14.163,49.161 21.706,49.161 J44.1@21.945,49.4
  BOTTOM w0.254: v1(51.145,49.2) C2.1@51.145,49.65 ; v2(56.7,47.738) 56.7,47.01 L3.2@56.722,46.987 ; L1.2@56.722,50.077 56.735,50.064 v2(56.735,49.327) ; R128.1@60.745,28.055 R128.1@60.752,28.062
  BOTTOM w0.508: v2(52.311,57.144) 52.899,57.144 53.113,57.358 ; v2(53.113,51.308) 53.113,57.358 ; v2(57.437,39.307) R12.1@57.437,40.056 60.165,40.056 R10.1@60.183,40.038 ; v2(58.07,57.361) 58.07,58.088 ccw(c57.96,58.088) 58.038,58.166 ; R128.1@60.745,28.055 60.745,27.866 60.78,27.831 v2(60.78,27.451) ; v2(64.816,53.645) 64.816,57.302 63.953,58.166 58.038,58.166 ; 53.113,57.358 53.921,58.166 58.038,58.166
  BOTTOM w0.762: v2(17.599,28.013) 17.631,28.044 18.19,28.044 v2(18.193,28.042) 18.207,28.028 25.868,28.028 28.722,30.881 R131.1@31.11,30.881
  other v1: 14.962,22.507 17.527,46.2 17.945,46.2 18.365,46.197
  other v2: 22.697,20.008 23.311,20.006 22.711,20.751 23.305,20.75 7.209,21.742 8.479,21.742 7.844,22.123 7.209,22.53 8.479,22.53 60.425,26.959 61.163,26.963 59.437,40.038 53.11,51.879
V5P0: C150.1 C151.1 C152.1 D29.2 L14.1 R114.2 R154.1 TP_V5P0.1 | length 30.4
  TOP w0.254: R114.2@9.33,56.505 9.435,56.4 9.831,56.4 v1(9.85,56.381) ; R154.1@13.57,34.728 13.592,34.75 v1(13.592,35.398)
  TOP w0.508: v2(7.318,39.7) C151.1@8.367,39.7 ; 7.318,41.859 C152.1@8.367,41.859 8.402,41.894 8.402,43.558 TP_V5P0.1@8.437,43.593
  L04_PWR w0.254: v2(7.318,39.7) 7.27,39.749 7.27,39.928 7.231,39.967 7.231,55.335 8.276,56.381 v1(9.85,56.381)
  BOTTOM w0.254: C150.1@8.367,39.6 C150.1@8.367,39.7 ; v2(8.809,37.795) 12.416,37.795 13.592,36.619 v1(13.592,35.398)
  other v2: 7.387,37.795 8.098,37.795 7.387,38.405 8.098,38.405 8.809,38.405
VBUS: J2.A4/B9 J2.B4/A9 L2.2 | length 8
  TOP w0.406: J2.B4/A9@68.101,50.144 68.655,50.144 68.707,50.091 68.763,50.091 68.944,49.911 v2(69.095,49.911)
  TOP w0.508: J2.A4/B9@68.095,45.45 68.101,45.456 68.78,45.456 68.804,45.48 v1(68.843,45.48)
  BOTTOM w0.508: L2.2@67.709,45.132 67.709,45.157 67.93,45.378 68.702,45.378 68.804,45.48 v1(68.843,45.48) ; 68.565,45.45 68.345,45.67 68.345,49.16 v2(69.095,49.911)
VBUS_5V: C8.1 D2.6 L2.1 | length 6.5
  TOP w0.254: D2.6@64.178,50.136 64.907,50.136 65.016,50.245 v2(65.085,50.245)
  BOTTOM w0.508: v2(65.085,50.245) 66.27,49.06 66.27,46.361 66.201,46.292 L2.1@66.201,45.225
VCC1_8FT: C11.1 C12.1 C13.1 C14.2 U1.12 U1.37 U1.49 U1.64 | length 30.9
  TOP w0.152: U1.12@61.776,51.799 61.78,51.795 62.704,51.795 v2(62.708,51.791)
  TOP w0.254: U1.37@50.176,51.799 50.209,51.766 50.891,51.766 51.032,51.624 v2(51.101,51.624) ; U1.49@52.226,44.249 52.209,44.265 52.209,45.307 v2(52.259,45.357) ; U1.64@59.726,44.249 60.346,44.249 v2(60.838,44.74)
  BOTTOM w0.254: C11.1@51.075,52.076 51.088,52.063 51.088,51.637 v2(51.101,51.624) ; C14.2@52.229,46.061 52.259,46.032 v2(52.259,45.357) ; C13.1@60.548,44.329 60.596,44.377 60.661,44.377 60.789,44.506 60.789,44.692 v2(60.838,44.74)
  BOTTOM w0.381: C12.1@61.956,51.839 61.989,51.805 62.693,51.805 v2(62.708,51.791)
  BOTTOM w0.508: v2(51.101,51.624) 51.392,51.624 52.145,50.872 52.145,46.061 52.145,45.471 v2(52.259,45.357) 53.216,44.4 60.498,44.4 v2(60.838,44.74) 61.085,44.74 61.745,45.4 61.745,50.827 v2(62.708,51.791)
VCC_CORE_V1P0: C113.1 C114.1 C115.1 C116.1 C117.1 C118.1 C119.1 C120.1 C121.2 C122.2 C123.2 C164.1 C165.1 C166.1 C168.1 D33.2 L16.1 R122.2 R149.2 R164.1 TP_VCC_CORE_V1P0.1 U3.F9 U3.F12 U3.J9 U3.J12 U3.L9 U3.L12 U3.N9 U3.N11 | length 45.1
  TOP w0.203: v1(40.255,26.84) 40.285,26.84 40.685,27.24 U3.N9@40.716,27.24 ; v1(40.315,28.44) U3.L9@40.716,28.84 ; v1(40.315,30.84) U3.J9@40.716,30.44 ; v1(40.315,33.24) U3.F9@40.716,32.84 ; v1(41.915,27.64) U3.N11@42.315,27.24 ; v1(42.715,29.24) U3.L12@43.115,28.84 ; v1(42.715,30.84) U3.J12@43.115,30.44 ; U3.F12@43.115,32.84 v1(43.515,33.24)
  TOP w0.254: R149.2@27.918,34.182 28.145,33.955 TP_VCC_CORE_V1P0.1@28.145,32.8
  TOP w0.508: v1(27.781,14.564) R164.1@28.584,14.564 ; R164.1@28.805,14.785 28.805,15.014 28.898,15.107 28.898,15.727 C164.1@28.945,15.773
  L04_PWR w0.203: v1(40.255,26.84) 40.296,26.84 40.574,27.118 40.593,27.118 40.737,27.262 40.737,27.804 40.769,27.836 40.769,28.192 40.709,28.252 40.709,28.608 40.947,28.846 ; v1(40.315,28.44) 40.722,28.846 40.947,28.846 ; v1(40.315,33.24) 40.696,32.859 ; v1(41.915,27.64) 41.915,27.663 41.58,27.998 41.58,28.55 41.49,28.64 41.284,28.846 40.947,28.846 ; v1@42.674,29.24 v1(42.715,29.24) 43.132,29.656 43.132,30.424 v1(42.715,30.84) 41.923,31.632 41.703,31.632 41.447,31.888 41.11,31.888 40.791,31.569 40.791,31.217 40.647,31.073 40.59,31.073 40.357,30.84 v1(40.315,30.84) 40.659,31.183 40.742,31.266 40.742,32.814 40.696,32.859 ; v1(43.515,33.24) 43.097,32.822 40.963,32.822 40.926,32.859 40.696,32.859
  BOTTOM w0.254: v2(26.945,9.2) 26.945,13.727 v1(27.781,14.564) ; v1(29.782,37.855) 29.782,52.683 R122.2@30.109,53.01
  other v2: 26.345,8 26.945,8 26.345,8.6 26.945,8.6 26.345,9.2 31.206,33.972 31.749,33.976 31.209,34.532 31.743,34.532 21.617,39.221 22.16,39.225 21.621,39.781 22.155,39.781
VCCIO0: C74.1 C75.1 C77.1 C78.1 J20.10 R76.1 R79.2 R81.2 R82.1 R84.2 R85.2 R86.2 R87.2 R127.2 R172.1 TP_VCCIO0.1 U3.E15 U6.8 | length 57.3
  TOP w0.203: U3.E15@45.515,33.64 v1(45.915,34.04)
  TOP w0.508: TP_VCCIO0.1@29.624,48.091 29.657,48.125 31.716,48.125 J20.10@31.75,48.158 31.775,48.133 v1(33.193,48.133) ; v1(39.545,47) R86.2@39.545,45.25 R86.2@39.588,45.293 ; R87.2@39.651,42.361 39.653,42.359 39.653,41.354 C78.1@39.655,41.352 ; R76.1@64.883,30.789 64.888,30.795 65.375,30.795 ; v2(64.945,32.2) 64.945,32 65.375,31.57 ; R82.1@65.939,32.091 65.926,32.078 65.926,31.365 ; v2(72.145,29.2) 72.88,29.2 R79.2@72.896,29.184 ; 65.375,30.795 65.375,31.57 ; 65.375,30.795 65.907,30.795 R81.2@65.912,30.8 65.926,30.814 65.926,31.365 ; 65.375,31.57 65.579,31.365 65.926,31.365
  L03_SIG w0.508: v1(44.568,42.377) v1(44.568,45.177) 46.137,45.177 49.161,48.2 53.345,48.2 55.345,50.2 v1(55.345,51.4) ; v2(64.945,32.2) 67.945,29.2 v2(72.145,29.2)
  L06_SIG w0.508: v1(50.545,33.8) 58.745,33.8 60.345,32.2 v2(64.945,32.2)
  BOTTOM w0.508: R127.2@25.52,47 25.52,46.994 25.726,46.788 v1(26.662,46.788) ; v1(44.568,42.377) R84.2@45.597,42.377 ; v1(44.568,45.177) 44.609,45.136 R85.2@45.621,45.136 ; v1(46.745,39) C74.1@47.344,39 ; v1(55.345,51.4) 56.002,51.4 R172.1@56.057,51.455
  other v1: 37.286,41.777 37.975,41.808 26.269,47.067 26.676,47.336
VCCIO1: C64.1 C65.1 C66.1 J1.1 R1.1 R2.1 R3.1 R14.2 R18.2 R19.2 R53.2 R54.2 R69.1 R75.2 R128.2 R174.2 R175.2 R176.2 R177.2 TP_VCCIO1.1 U3.G17 U3.J18 | length 66.2
  TOP w0.152: v2(46.821,47.128) 46.821,47.943 R18.2@46.87,47.992 ; R54.2@55.294,9.4 55.345,9.45 v1(55.345,9.8)
  TOP w0.203: U3.G17@47.115,32.04 47.115,32.037 47.535,31.617 v1(47.535,31.614) ; v1(47.515,30.84) U3.J18@47.915,30.44
  TOP w0.305: R14.2@36.089,56.505 36.794,56.505 36.89,56.6 v2(36.945,56.6) ; v1(46.819,55.693) 46.819,55.027 R19.2@46.87,54.977 ; v2(57.873,8.646) 57.873,8.701 57.95,8.778 57.95,9.234 R53.2@58.122,9.407 ; v2(65.745,17.2) 65.766,17.178 66.371,17.178 R69.1@66.392,17.157 ; v2(72.872,37.536) 72.884,37.524 72.884,36.994 R175.2@72.896,36.982 ; R177.2@72.896,31.8 v2(72.896,32.351) ; R176.2@72.896,34.348 v2(72.896,34.899) ; R174.2@72.896,39.522 v2(72.896,40.073)
  TOP w0.508: J1.1@59.934,29.616 v1(61.328,29.616)
  L06_SIG w0.305: v2(46.821,47.128) v1(46.819,55.693)
  BOTTOM w0.305: v2(36.945,56.6) 39.145,56.6 39.822,57.277 46.268,57.277 46.819,56.725 v1(46.819,55.693) ; v2(46.821,47.128) 47.616,47.128 49.745,45 49.745,44 52.545,41.2 52.545,34.41 50.945,32.81 49.226,31.091 47.545,31.091 47.545,30.869 v1(47.515,30.84) ; C65.1@47.415,30.586 47.46,30.631 v1@47.46,30.84 ; 47.46,31.091 47.46,31.283 47.526,31.349 47.526,31.604 v1(47.535,31.614) 47.526,31.623 47.526,31.846 47.478,31.894 C66.1@47.46,31.894 ; TP_VCCIO1.1@64.745,17.2 v2(65.745,17.2) 65.745,29.2
  BOTTOM w0.508: R1.1@57.084,29.594 57.284,29.594 57.305,29.615 v1(57.736,29.615)
  other v1: 57.742,28.384 57.742,28.793 57.736,29.196
  other v2: 52.545,35.123
VCCIO2: C58.1 C59.1 C60.1 R129.2 TP_VCCIO2.1 U3.N17 U3.U19 | length 2.7
  TOP w0.203: U3.N17@47.115,27.24 47.169,27.24 47.409,27 v1(47.438,27) ; U3.U19@48.715,24.04 48.715,24.06 v1(49.053,24.398)
  BOTTOM w0.203: R129.2@59.17,26.2 59.198,26.171 TP_VCCIO2.1@59.198,24.431
VCCIO3: C106.1 C107.1 C108.1 R134.2 TP_VCCIO3.1 U3.U13 U3.V15 | length 7.4
  TOP w0.203: U3.U13@43.915,24.04 43.915,24.054 44.311,24.449 v1(44.311,24.463) ; U3.V15@45.515,23.24 v1(45.915,22.84)
  L04_PWR w0.254: v1(44.311,24.463) 44.311,23.4 44.871,22.84 v1(45.915,22.84)
  BOTTOM w0.254: R134.2@44.774,18.918 44.781,18.91 TP_VCCIO3.1@46.577,18.91
  BOTTOM w0.61: C108.1@44.744,20.4 44.759,20.385 44.759,18.932 R134.2@44.774,18.918
VCCIO4: C94.1 C95.1 C96.1 R135.2 TP_VCCIO4.1 U3.T9 U3.V8 | length 2.6
  TOP w0.203: U3.V8@39.933,23.228 39.933,23.257 v1(40.237,23.56) ; v1(40.315,24.44) U3.T9@40.716,24.84
  BOTTOM w0.203: R135.2@40.545,18.775 40.57,18.775 41.103,18.241 TP_VCCIO4.1@41.924,18.241
VCCIO5: C91.1 C92.1 C93.1 R136.2 TP_VCCIO5.1 U3.V3 | length 6.9
  TOP w0.203: U3.V3@35.915,23.24 35.915,23.204 36.324,22.796 v1(36.324,22.76)
  TOP w0.508: v2(34.223,18.854) TP_VCCIO5.1@34.227,18.85
  BOTTOM w0.508: v2(34.223,18.854) 35.115,18.854 R136.2@35.139,18.83 ; R136.2@35.17,18.8 R136.2@35.139,18.83 ; C93.1@36.705,22.774 36.338,22.774 v1(36.324,22.76) 35.959,22.76 35.945,22.774 35.623,22.774 35.139,22.29 R136.2@35.139,18.83
VCCIO6: C20.1 C52.1 C53.1 C54.1 C55.1 R23.2 R25.1 R26.1 R32.1 R33.1 R36.2 R43.1 R44.1 R45.1 R46.1 R51.2 R130.2 TP_VCCIO6.1 U3.L3 U3.P3 X2.4 | length 32.4
  TOP w0.203: TP_VCCIO6.1@25.553,30.393 25.582,30.422 25.582,31.079 25.806,31.303 26.082,31.303 v1(26.089,31.296) ; v1(35.515,26.04) U3.P3@35.915,26.44 ; U3.L3@35.915,28.84 v1(36.315,29.24) ; v1(67.391,21.562) 67.803,21.562 R51.2@67.922,21.682
  TOP w0.254: v1(26.089,31.296) C20.1@26.536,31.296 ; R23.2@26.543,30.451 26.543,31.288 C20.1@26.536,31.296 ; X2.4@27.907,31.226 27.838,31.296 C20.1@26.536,31.296 ; v2(35.595,53.15) R43.1@36.145,53.15 R44.1@37.145,53.15
  TOP w0.508: R36.2@67.026,7.753 67.097,7.824 67.097,8.194 67.671,8.768 72.19,8.768 v1(72.218,8.74)
  BOTTOM w0.203: v1(3.976,44.872) 4.58,45.476 R25.1@4.58,46.178 ; R26.1@4.592,47.01 4.592,46.203 R25.1@4.595,46.2 ; 32.745,26.632 C52.1@32.745,27.4 ; C54.1@35.481,26.428 35.498,26.41 35.498,26.057 v1(35.515,26.04) ; R46.1@71.187,26.655 72.273,26.655 R45.1@72.297,26.68
  BOTTOM w0.254: v1(71.676,26.698) 71.685,26.689 72.288,26.689 R45.1@72.297,26.68 ; R33.1@72.945,4.85 73.847,4.85 R32.1@73.852,4.844
  BOTTOM w0.406: v1(67.391,21.562) 69.307,21.562 70.212,22.467 70.212,26.933 v1(70.145,27)
  BOTTOM w0.508: v2(35.595,53.15) 36.188,53.743 36.188,57.178 v2(36.063,57.302) ; R33.1@72.945,4.85 72.95,4.844 R32.1@73.852,4.844
  other v1: 73.405,4.855
  other v2: 32.385,26.533 33.425,26.57 33.025,27.056
VCCIO7: C56.1 C57.1 C67.1 C68.1 R131.2 TP_VCCIO7.1 U3.E5 U3.H3 | length 2.8
  TOP w0.203: U3.H3@35.915,31.24 35.969,31.24 36.067,31.338 36.07,31.338 v1@36.331,31.6 ; v1(37.115,33.24) U3.E5@37.515,33.64
  BOTTOM w0.203: TP_VCCIO7.1@29.529,32.531 31.01,32.531 R131.2@31.11,32.431
  other v1: 36.345,31.6
pads on no net: IC1.2 IC1.3 IC1.10 J2. J2.A8 J2.B8 J3.13 J3.14 J3.20 J3.23 J4.13 J4.14 J4.20 J4.23 J5.13 J5.14 J5.20 J5.23 J6.13 J6.14 J6.20 J6.23 J7.11 J7.16 J7.17 U1.21 U1.22 U1.23 U1.26 U1.27 U1.28 U1.29 U1.30 U1.32 U1.33 U1.34 U1.36 U1.41 U1.43 U1.44 U1.45 U1.46 U1.48 U1.52 U1.53 U1.54 U1.55 U1.57 U1.58 U1.59 U1.60 U2.7 U3.A4 U3.A6 U3.A10 U3.A12 U3.A13 U3.A18 U3.A19 U3.B4 U3.B6 U3.B10 U3.B11 U3.B13 U3.B15 U3.B17 U3.B18 U3.B20 U3.C2 U3.C13 U3.C14 U3.C16 U3.C18 U3.C20 U3.D1 U3.D3 U3.D4 U3.D5 U3.D6 U3.D7 U3.D8 U3.D9 U3.D10 U3.D17 U3.D18 U3.E2 U3.E3 U3.E4 U3.E7 U3.E8 U3.E9 U3.E10 U3.E18 U3.F1 U3.F2 U3.F3 U3.F4 U3.F5 U3.F6 U3.F7 U3.F8 U3.G1 U3.G2 U3.G3 U3.G4 U3.G5 U3.G6 U3.G7 U3.G8 U3.G20 U3.H1 U3.H2 U3.H5 U3.H6 U3.H7 U3.H8 U3.H13 U3.H14 U3.H15 U3.H16 U3.H17 U3.H18 U3.H19 U3.H20 U3.J1 U3.J2 U3.J3 U3.J4 U3.J5 U3.J6 U3.J7 U3.J8 U3.J13 U3.J14 U3.J15 U3.J16 U3.J19 U3.J20 U3.K1 U3.K2 U3.K3 U3.K4 U3.K5 U3.K6 U3.K7 U3.K8 U3.K13 U3.K14 U3.K15 U3.K16 U3.K17 U3.K18 U3.K19 U3.K20 U3.L1 U3.L2 U3.L6 U3.L7 U3.L8 U3.L15 U3.L16 U3.L17 U3.L18 U3.L19 U3.L20 U3.M1 U3.M2 U3.M7 U3.M14 U3.M15 U3.M16 U3.M17 U3.M18 U3.M19 U3.M20 U3.N1 U3.N2 U3.N3 U3.N14 U3.N15 U3.N16 U3.N19 U3.N20 U3.P9 U3.P10 U3.P11 U3.P12 U3.P13 U3.P15 U3.P16 U3.P17 U3.P18 U3.P19 U3.P20 U3.R1 U3.R2 U3.R3 U3.R4 U3.R5 U3.R6 U3.R10 U3.R11 U3.R12 U3.R13 U3.R15 U3.R17 U3.R18 U3.R19 U3.R20 U3.T1 U3.T2 U3.T3 U3.T4 U3.T5 U3.T10 U3.T11 U3.T12 U3.T18 U3.T20 U3.U1 U3.U2 U3.U3 U3.U4 U3.U5 U3.U10 U3.U12 U3.U14 U3.U16 U3.U18 U3.U20 U3.V1 U3.V2 U3.V4 U3.V5 U3.V7 U3.V9 U3.V10 U3.V14 U3.V17 U3.V18 U3.V19 U3.V20 U3.W1 U3.W2 U3.W4 U3.W5 U3.W6 U3.W7 U3.W8 U3.W9 U3.W10 U3.W12 U3.W14 U3.W15 U3.W17 U3.W19 U3.W20 U3.Y2 U3.Y3 U3.Y4 U3.Y5 U3.Y6 U3.Y8 U3.Y9 U3.Y10 U3.Y12 U3.Y13 U3.Y14 U3.Y17 U3.Y18 U3.Y19 U15.20 U15.23 U16.20 U16.23

## Polygon pours and split planes (outlines as drawn)
GND on TOP "TOP-GND 4" (solid, remove dead copper, pour order 0): 9.204,30.87 9.204,28.254 9.027,28.076 9.027,26.914 9.114,26.826 9.114,19.806 9.489,19.431 12.111,19.431 12.469,19.788 12.469,24.843 12.873,25.248 16.607,25.248 17.545,26.185 17.545,36.019 16.912,36.652 12.568,36.652 12.06,37.16 12.06,42.57 11.771,42.86 9.868,42.86 9.578,42.57 9.578,34.406 9.204,34.033 9.204,32.106 9.034,31.936 9.034,31.04
GND on TOP "TOP-GND 2" (solid, remove dead copper, pour order 14): 32.494,9.721 35.11,9.721 35.287,9.543 36.45,9.543 36.457,9.551 46.945,9.551 46.945,17.465 46.21,18.2 22.31,18.2 21.945,17.834 21.945,9.8 31.178,9.8 31.427,9.551 32.323,9.551
GND on TOP "GND_L01_P152" (solid, pour order 152): 40.515,31.44 40.909,31.44 40.909,28.245 39.305,28.245 39.305,27.534 44.574,27.534 44.574,28.739 42.566,28.739 42.566,31.602 44.184,31.602 44.184,33.44 39.39,33.44 39.39,32.244 40.515,32.244
VCC_CORE_V1P0 on TOP "VCC_CORE_V1P0_L01_P017" (solid, pour order 17): 20.145,2.796 23.745,2.796 23.745,6.548 24.597,7.4 28.75,7.4 28.75,9.449 21.884,9.449 20.145,7.71
VCC_CORE_V1P0 on TOP "VCC_CORE_V1P0_L01_P063" (solid, pour order 63): 29.866,35.121 29.866,36.879 27.798,38.947 21.345,38.947 21.345,40.107 28.238,40.107 30.828,37.516 30.828,35.116 31.145,34.8 32.145,34.8 32.145,33.6 27.35,33.6 27.35,34.8 29.545,34.8
V5P0 on TOP "V5P0_L01_P005" (solid, pour order 5): 8.758,42.868 2.274,42.868 1.951,42.545 1.951,40.208 2.256,39.903 6.641,39.903 6.988,39.557 6.988,34.867 7.272,34.583 8.873,34.583 9.206,34.916 9.206,42.42
V1P8 on TOP "V1P8_L01_P149" (solid, pour order 149): 0.834,46.203 0.834,47.136 0.967,47.269 1.925,47.269 1.925,47.537 1.812,47.65 0.376,47.65 0.249,47.523 0.249,46.126 0.757,46.126 0.808,46.177
V1P8_VCCAUX on TOP "V1P8_VCCAUX_L01_P127" (solid, pour order 127): 28.464,26.991 28.345,27.11 28.345,28.8 32.145,28.8 32.345,28.6 32.345,27.4 31.935,26.991
VCCIO6 on TOP "VCCIO6_L01_P136" (solid, remove dead copper, pour order 136): 33.227,24.948 33.64,24.948 33.747,25.055 33.747,27.363 32.817,27.363 31.923,26.469 31.923,24.95
V1P8 on TOP "V1P8_L01_P135" (solid, remove dead copper, pour order 135): 31.568,26.622 26.668,26.622 26.564,26.518 26.564,20.709 27.092,20.18 31.364,20.18 31.568,20.384
V3P3 on TOP "V3P3_L01_P118" (solid, pour order 118): 18.272,48.303 18.272,48.295 18.122,48.145 17.732,48.145 17.732,48.153 17.582,48.303 17.145,48.303 17.145,45.8 17.345,45.6 18.545,45.6 18.745,45.8 18.745,48.2 18.642,48.303
+12.0V on TOP "+12.0V_L01_P074" (solid, remove dead copper, pour order 74): 9.945,15 9.145,15.8 2.145,15.8 1.345,15 1.345,11.071 2.016,10.4 9.329,10.4 9.945,11.016